# EAGLE board acq05 (EAGLE 9.5.1)
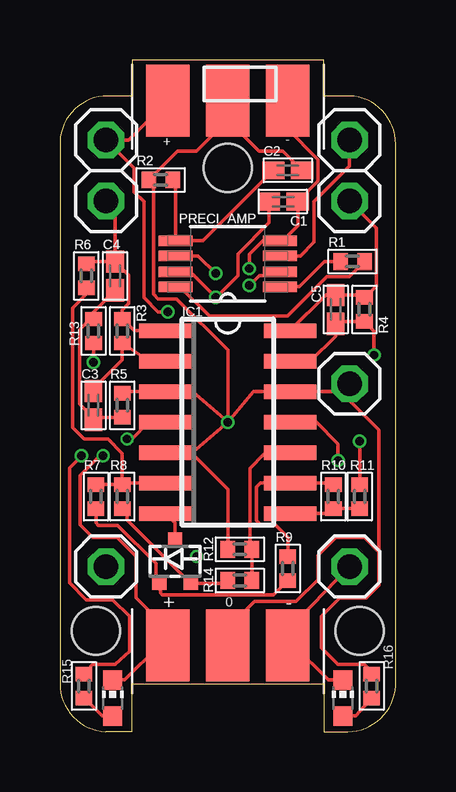
[diagram p0: board, top side]
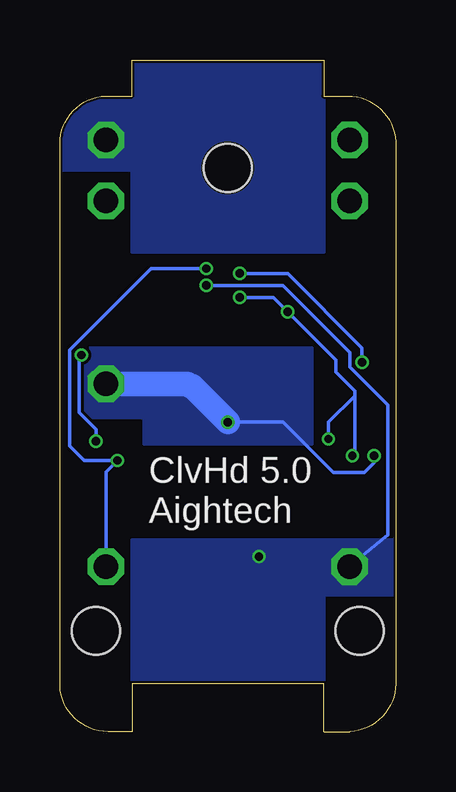
[diagram p1: board, bottom side, seen from below]

Size 14 x 28 mm. Coordinates in mm from the lower left corner, seen from the top.
Outline: 3,0 3,2 11,2 11,0 12,0 arc87 14,1.9 14,24.5 arc87 12.1,26.5 11,26.5 11,28 3,28 3,26.5 2,26.5 arc87 0,24.6 0,2 arc87 1.9,0 3,0
Copper layers (1*16): Top 0.035559375mm / dielectric 0.17018125mm / Bottom 0.035559375mm
Design rules "jlcpcb-4-layer *": minimum track width 5mil, minimum drill 0.2mm, track to track 0.126490625mm, track to pad 0.126490625mm, pad to pad 0.126490625mm, via to via 0.126490625mm, smd to smd 0mil, copper to edge 0.1mm, drill to drill 5mil, minimum pad ring 4mil, minimum via ring 4mil, stop-mask expansion 3mil, vias tented up to drill 100mil, thermal gap 10mil
Holes 2 mm at 1.5,4.2 12.5,4.2 7,23.5

## Footprints (pad centres in the part's own frame; a part is rotated, then mirrored left to right if it is on the bottom)
C0402K = smd 0.925 x 0.74: 1 -0.6,0; 2 0.6,0
SOT323 = smd 0.6 x 0.55: 1 -0.65,-0.925; 2 0.65,-0.925; 3 0,0.925
SO14 = smd 0.6 x 2.2: 1 -3.81,-2.6; 2 -2.54,-2.6; 3 -1.27,-2.6; 4 0,-2.6; 5 1.27,-2.6; 6 2.54,-2.6; 7 3.81,-2.6; 8 3.81,2.6; 9 2.54,2.6; 10 1.27,2.6; 11 0,2.6; 12 -1.27,2.6; 13 -2.54,2.6; 14 -3.81,2.6
1X01 = drill 1.016 octagon: 1 0,0
CHIP-LED0603 = smd 0.8 x 0.8: A 0,-0.75; C 0,0.75
SOP65P490X110-8N = smd 1.422 x 0.432: 1 -2.184,0.965; 2 -2.184,0.33; 3 -2.184,-0.33; 4 -2.184,-0.965; 5 2.184,-0.965; 6 2.184,-0.33; 7 2.184,0.33; 8 2.184,0.965
R0402 = smd 0.6 x 0.7: 1 -0.5,0; 2 0.5,0
009176003 = smd 1.8 x 3: 1 -2.5,0; 2 0,0; 3 2.5,0

## Placement (x,y rotation side)
C1  0.1nF  [C0402K]  9.32,22.09 0 top
C2  1nF  [C0402K]  9.5,23.4 180 top
C3  0.1nF  [C0402K]  1.4,13.6 270 top
C4  0.1nF  [C0402K]  2.3,19 270 top
C5  0.1nF  [C0402K]  11.5,17.6 90 top
D3  HSMS-285C  [SOT323]  4.8,7.1 0 top
IC1  LMV324M  [SO14]  7,12.9 270 top
JP1  [1X01]  1.92,6.88 0 top
JP2  [1X01]  12.08,24.66 0 top
JP3  [1X01]  1.92,22.12 0 top
JP4  [1X01]  12.08,22.12 0 top
JP5  [1X01]  1.92,24.66 0 top
JP6  [1X01]  12.08,6.88 0 top
JP7  [1X01]  12.08,14.5 0 top
LED1  [CHIP-LED0603]  11.8,1.4 0 top
LED2  [CHIP-LED0603]  2.2,1.4 0 top
PRECI_AMP  INA326EA/250  [SOP65P490X110-8N]  7,19.5 180 top
R1  100k  [R0402]  12.2,19.6 0 top
R2  100k  [R0402]  4.2,23 0 top
R3  100k  [R0402]  2.6,16.7 90 top
R4  100k  [R0402]  12.7,17.6 90 top
R5  100k  [R0402]  2.6,13.6 90 top
R6  100k  [R0402]  1.1,19 270 top
R7  100k  [R0402]  1.5,9.8 270 top
R8  100k  [R0402]  2.6,9.8 270 top
R9  100k  [R0402]  9.5,6.8 90 top
R10  100k  [R0402]  11.4,9.8 270 top
R11  100k  [R0402]  12.5,9.8 90 top
R12  100k  [R0402]  7.5,7.6 0 top
R13  100k  [R0402]  1.4,16.7 90 top
R14  100k  [R0402]  7.5,6.3 180 top
R15  [R0402]  1,1.9 270 top
R16  [R0402]  13,1.9 90 top
X3  009176003  [009176003]  7,3.6 0 top
X5  009176003  [009176003]  7,26.3 0 top

## Library data of the parts
C1-C5 = rcl; SPICEPREFIX: C
D3 = avago
IC1 = linear; SPICEPREFIX: J
JP1-JP7 = pinhead
LED1 LED2 = led
PRECI_AMP = INA326EA_250; DESCRIPTION: Precision, Low Drift, CMOS Instrumentation Amplifier 8-VSSOP -40 to 85; DIGI-KEY_PART_NUMBER: 296-15312-1-ND; DIGI-KEY_PURCHASE_URL: https://www.digikey.com/product-detail/en/texas-instruments/INA326EA-250/296-15312-1-ND/568254?utm_source=snapeda&utm_medium=aggregator&utm_campaign=symbol; MF: Texas Instruments; MP: INA326EA/250; PACKAGE: MSOP-8 Texas Instruments
R1-R16 = rcl; SPICEPREFIX: R
X3 X5 = pinsmd; MPN: 009176003001106; OC_FARNELL: 1778540; OC_NEWARK: 52R7005

## Nets
GNDA: C2.1 IC1.3 IC1.5 IC1.12 JP7.1 R2.1 R5.2 R12.1 R15.1 R16.2 X3.2 X5.2
INM: JP1.1 PRECI_AMP.2
INP: JP2.1 PRECI_AMP.3
N$1: PRECI_AMP.1 R1.1
N$2: PRECI_AMP.8 R1.2
N$4: C2.2 PRECI_AMP.5 R2.2
N$6: C3.1 IC1.2 R3.1
N$7: C3.2 C4.2 R5.1 R13.2
N$8: C5.1 IC1.13 R4.1 R11.2
N$9: PRECI_AMP.6 R13.1
N$10: IC1.6 R6.2 R7.1 R8.1
N$11: D3.2 R8.2 R14.2
N$12: IC1.9 R9.2 R10.1
N$13: D3.3 IC1.7
N$14: D3.1 R7.2 R9.1
N$15: IC1.8 R10.2 R11.1
N$16: C5.2 IC1.14 JP4.1 R4.2
N$18: IC1.10 R12.2 R14.1
N$23: C4.1 IC1.1 JP3.1 R3.2 R6.1
N$54: LED2.A R15.2
N$55: LED1.A R16.1
V+: C1.1 IC1.4 JP5.1 LED2.C PRECI_AMP.7 X3.1 X5.1
V-: C1.2 IC1.11 JP6.1 LED1.C PRECI_AMP.4 X3.3 X5.3

## Tracks (layer width: path | path; a pad name or v marks a point on that pad's centre or on a via)
GNDA  (via drill 0.35)
  Top 0.152: v7,12.9 5.53,14.17 IC1.3 2.73,14.17 R5.2 | v7,12.9 8.07,14.17 IC1.12 11.75,14.17 JP7.1 12.08,13.8 13.3,12.58 13.3,7.5 | v7,12.9 5.53,11.63 IC1.5 5.47,11.63 7,10.1 R12.1 | R15.1 1.36,2.8 2.3,2.8 2.9,3.35 2.9,4.8 2.2,5.5 1.1,5.5 0.4,6.2 0.4,11 v0.9,11.5 | X3.2 7,4.3 8.12,5.42 9.85,5.42 10.75,6.32 10.75,7.35 11.5,8.1 12.7,8.1 13.3,7.5 | R16.2 13,2.5 12.7,2.8 11.6,2.8 10.9,3.5 10.9,4.8 11.68,5.58 12.78,5.58 13.3,6.1 13.3,7.5 | 7,25.5 5.7,24.2 4.9,24.2 R2.1 3.9,22.8 3.9,18.23 4.1,18.04 4.86,18.04 7,15.9 v7,12.9 | C2.1 9.3,24.2 8.3,24.2 7,25.5 | 7,25.5 X5.2
  Bottom 0.152: v0.9,11.5 0.9,11.2 1.3,10.8 2.6,10.8 4.7,12.9 v7,12.9
  Bottom 1.016: JP7.1 8.68,14.5 8.58,14.4 8.5,14.4 v7,12.9
  pour Bottom (no thermals): 3.5,16 13.1,16 13.1,13.1 10.5,13.1 10.5,12 3.5,12
INM  (via drill 0.35)
  Top 0.152: v7.9,18.6 8.32,19.02 9.04,19.02 PRECI_AMP.2
  Bottom 0.152: JP1.1 0.32,8.2 0.32,13.62 1.9,15.2 1.9,15.8 4.7,18.6 v7.9,18.6
  other vias: 5.7,7.3
  pour Bottom (no thermals): 0,8 0,5.7 3,5.7 3,2 11,2 11,8
INP
  Top 0.152: JP2.1 12.08,23.58 10.6,22.1 10.6,20.4 10.03,19.83 PRECI_AMP.3
  pour Bottom (no thermals): 3,28 11,28 11,26.5 14,26.5 14,23.4 11,23.4 11,20 3,20
N$1
  Top 0.152: PRECI_AMP.1 9.2,18.55 9.98,18.55 11.03,19.6 R1.1
N$2
  Top 0.152: R1.2 12.06,18.96 11.13,18.96 9.48,17.32 6.23,17.32 5.02,18.54 PRECI_AMP.8
N$4
  Top 0.152: R2.2 4.82,22.88 PRECI_AMP.5 5.96,20.46 C2.2
N$6
  Top 0.152: C3.1 1.4,14.3 2.6,15.5 R3.1 3.72,15.44 IC1.2
N$7
  Top 0.152: C4.2 1.4,17.5 R13.2 1.26,17.2 0.83,16.76 0.83,13.65 1.4,13.08 C3.2 1.5,13.1 R5.1
N$8  (via drill 0.35)
  Top 0.152: IC1.13 10.44,15.44 11.5,16.5 C5.1 11.4,17.1 R4.1 13.1,16.7 v13.1,15.7 | R11.2 v12.5,12.1
  Bottom 0.152: v13.1,15.7 13.2,15.6 13.2,13.3 12.5,12.6 v12.5,12.1
N$9  (via drill 0.35)
  Top 0.152: R13.1 v1.4,15.4 | PRECI_AMP.6 5.77,19.83 v6.5,19.1
  Bottom 0.152: v6.5,19.1 4.5,19.1 1.4,16 v1.4,15.4
N$10
  Top 0.152: R8.1 R7.1 | R8.1 2.89,10.36 IC1.6 | R6.2 1.1,18.24 0.53,17.66 0.53,12.67 1,12.2 2,12.2 2.6,11.6 R8.1
N$11
  Top 0.152: R8.2 2.8,9.1 2.8,8.82 D3.2 6.88,6.17 R14.2
N$12
  Top 0.152: R10.1 11.4,10.5 11.26,10.36 IC1.9 8.36,10.36 8.2,10.2 8.2,8.8 8.41,8.59 9,8.59 9.5,8.09 R9.2
N$13
  Top 0.152: D3.3 4.8,8.69 IC1.7
N$14
  Top 0.152: R9.1 8.91,5.7 4.27,5.7 4.19,5.77 D3.1 4,6.33 4,7.01 2.41,8.6 1.6,8.6 1.5,8.7 R7.2
N$15
  Top 0.152: IC1.8 11.37,9.09 R10.2 R11.1
N$16
  Top 0.152: IC1.14 11.09,18.2 C5.2 12.6,18.2 R4.2 12.74,18.1 13.2,18.57 13.2,21 JP4.1
N$18
  Top 0.152: R14.1 R12.2 7.92,7.68 7.92,10.97 8.52,11.56 9.33,11.56 IC1.10
N$23
  Top 0.152: R6.1 1.2,19.6 C4.1 | JP3.1 2.3,21.74 C4.1 | IC1.1 3.09,16.71 R3.2 2.6,17.58 2.87,17.85 2.87,19.03 C4.1
N$54
  Top 0.152: R15.2 1.75,0.65 LED2.A
N$55
  Top 0.152: LED1.A 12.35,0.65 R16.1
V+  (via drill 0.35)
  Top 0.152: IC1.4 3.7,12.9 3,12.2 v2.8,12.2 | LED2.C 2.7,2.15 4.13,3.58 4.48,3.58 | 4.48,3.58 5.18,3.58 3.18,5.57 3.18,7.3 2.39,8.1 1.37,8.1 0.85,8.62 0.85,10.68 1.66,11.5 v1.8,11.5 | 4.48,3.58 X3.1 | X5.1 2.86,24.66 JP5.1 3.1,23.48 3.1,22.5 3.5,22.1 3.5,18.1 4.1,17.5 v4.5,17.5 | PRECI_AMP.7 5.43,19.17 v6.5,18.1 7.42,19.02 7.42,19.91 8.72,21.21 C1.1
  Bottom 0.152: v6.5,18.1 5.1,18.1 v4.5,17.5 2.5,15.5 2.5,15 1.7,14.2 1.7,14 | 1.7,14 1.7,11.6 v1.8,11.5 | 1.7,14 2.8,12.9 v2.8,12.2
V-  (via drill 0.35)
  Top 0.152: LED1.C 11.2,2.15 9.75,3.6 X3.3 9.5,4.22 JP6.1 | X5.3 9.5,25.12 10.77,23.85 10.77,22.95 C1.2 9.92,21.09 9.3,20.46 PRECI_AMP.4 8.46,20.46 7.9,19.9 v7.9,19.3 | IC1.11 10.7,12.9 11.6,12 v11.6,11.3
  Bottom 0.152: JP6.1 12.08,10.82 v11.6,11.3 13,11.3 13.6,11.9 13.6,15.9 10.2,19.3 v7.9,19.3

## Text on the board
bPlace: ClvHd 5.0 / Aightech
tNames: R2 | + | C2 | - | PRECI_AMP | C1 | R6 | C4 | R1 | R3 | C5 | R13 | IC1 | R4 | C3 | R5 | R7 | R8 | R10 | R11 | R9 | R12 | R14 | + | 0 | -